# EAGLE board one-stage-full-wave-cockcroft-walton (EAGLE 9.5.0)
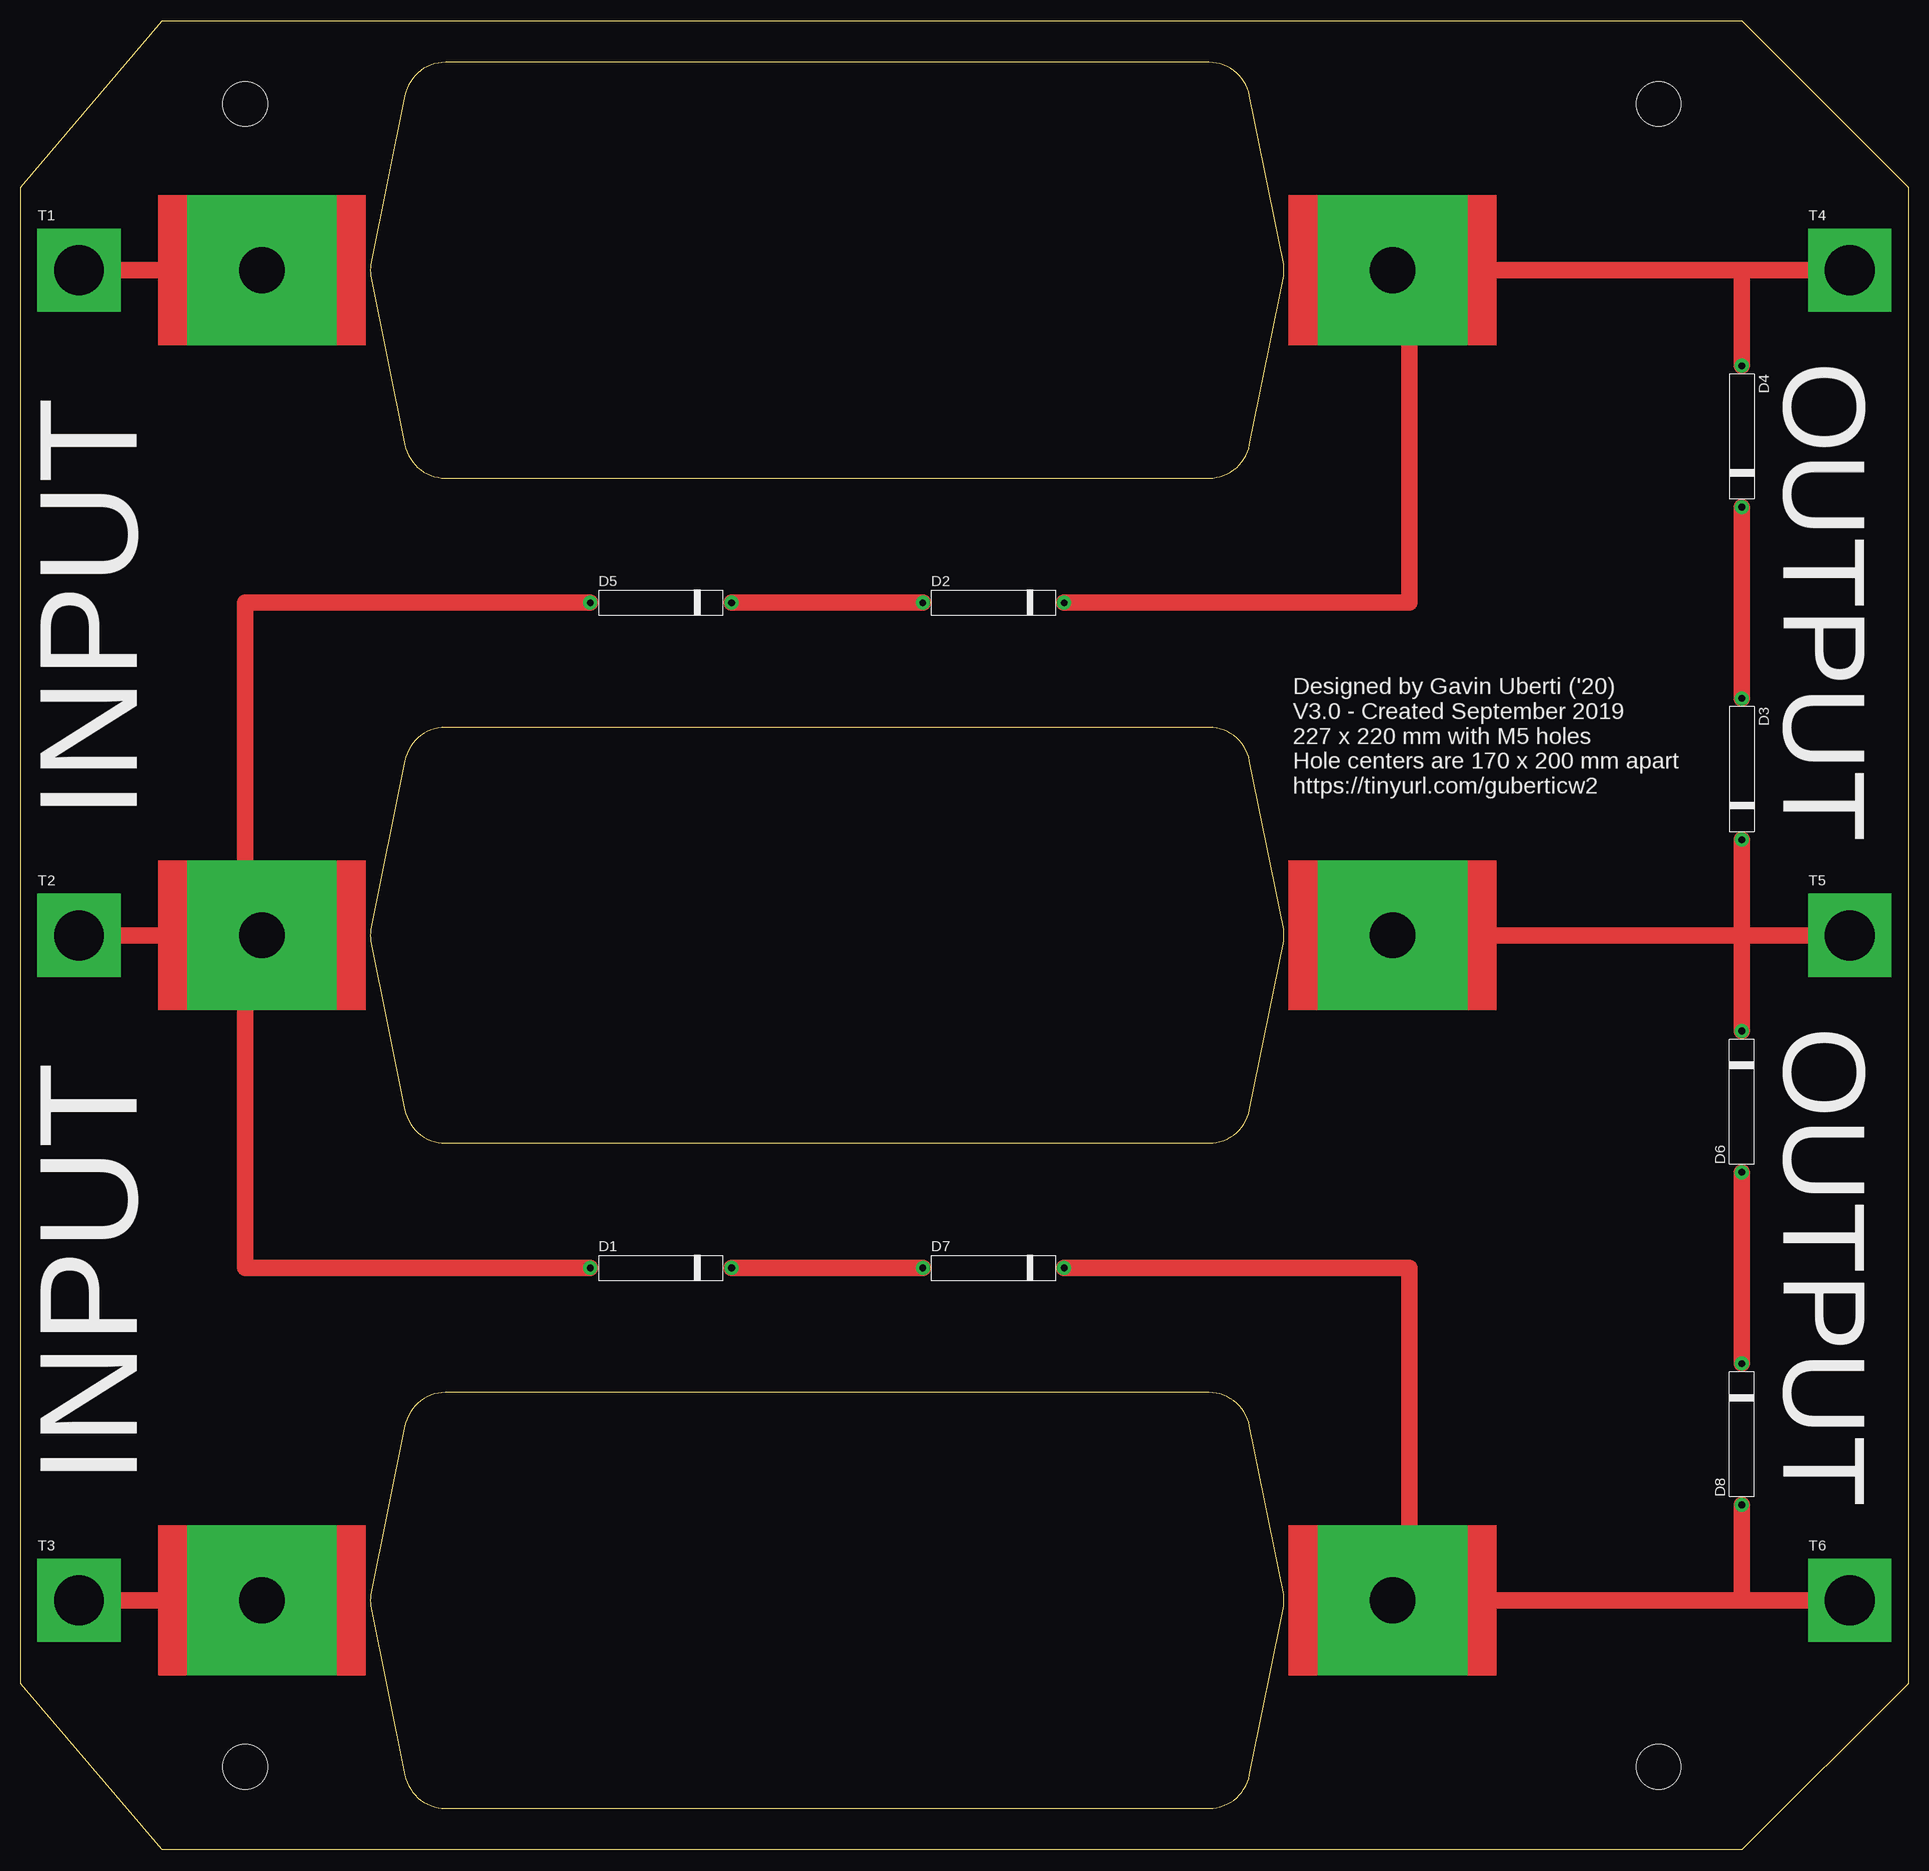
[diagram p0: board, top side]

Size 227 x 220 mm. Coordinates in mm from the lower left corner, seen from the top.
Outline: 17,0 0,20 0,200 17,220 207,220 227,200 227,20 207,0 17,0
Copper layers (1*16): Top 0.035mm / dielectric 1.5mm / Bottom 0.035mm
Design rules "default": minimum track width 6mil, minimum drill 0.35mm, track to track 6mil, track to pad 6mil, pad to pad 6mil, via to via 6mil, smd to smd 6mil, copper to edge 40mil, drill to drill 6mil, minimum pad ring 10mil, minimum via ring 8mil, stop-mask expansion 4mil, vias tented up to drill 0mil, thermal gap 10mil
Holes 5.4 mm at 27,210 197,210 197,10 27,10

## Footprints (pad centres in the part's own frame; a part is rotated, then mirrored left to right if it is on the bottom)
DIODE_14 = drill 0.8 pad 1.676: P$1 -8.5,0; P$2 8.5,0
LUG_SQUARE_M6 = drill 6 pad 10 square: P$1 0,0
HV_FILM_CAP = drill 5.5 pad 18 square: P$1 -68,0; P$2 68,0

## Placement (x,y rotation side)
D1  DIODE_14MM  [DIODE_14]  77,70 0 top
D2  DIODE_14MM  [DIODE_14]  117,150 0 top
D3  DIODE_14MM  [DIODE_14]  207,130 270 top
D4  DIODE_14MM  [DIODE_14]  207,170 270 top
D5  DIODE_14MM  [DIODE_14]  77,150 0 top
D6  DIODE_14MM  [DIODE_14]  207,90 90 top
D7  DIODE_14MM  [DIODE_14]  117,70 0 top
D8  DIODE_14MM  [DIODE_14]  207,50 90 top
T1  TERMINAL_M6  [LUG_SQUARE_M6]  7,190 0 top
T2  TERMINAL_M6  [LUG_SQUARE_M6]  7,110 0 top
T3  TERMINAL_M6  [LUG_SQUARE_M6]  7,30 0 top
T4  TERMINAL_M6  [LUG_SQUARE_M6]  220,190 0 top
T5  TERMINAL_M6  [LUG_SQUARE_M6]  220,110 0 top
T6  TERMINAL_M6  [LUG_SQUARE_M6]  220,30 0 top
U$1  HV_FILM_CAP  [HV_FILM_CAP]  97,110 180 top
U$2  HV_FILM_CAP  [HV_FILM_CAP]  97,190 180 top
U$3  HV_FILM_CAP  [HV_FILM_CAP]  97,30 180 top

## Library data of the parts
D1-D8 T1-T6 U$1-U$3 = guParts

## Nets
N$1: D1.P$1 D5.P$1 T2.P$1 U$1.P$2
N$2: D2.P$1 D5.P$2
N$3: D2.P$2 D4.P$1 T4.P$1 U$2.P$1
N$5: D3.P$1 D4.P$2
N$6: T3.P$1 U$3.P$2
N$7: T1.P$1 U$2.P$2
N$8: D7.P$2 D8.P$1 T6.P$1 U$3.P$1
N$9: D3.P$2 D6.P$2 T5.P$1 U$1.P$1
N$10: D1.P$2 D7.P$1
N$11: D6.P$1 D8.P$2

## Tracks (layer width: path | path; a pad name or v marks a point on that pad's centre or on a via)
N$1
  Top 2: D5.P$1 27,150 27,112 U$1.P$2 | D1.P$1 27,70 27,108 U$1.P$2 | T2.P$1 U$1.P$2
N$2
  Top 2: D5.P$2 D2.P$1
N$3
  Top 2: D2.P$2 167,150 167,188 U$2.P$1 207,190 | 207,190 T4.P$1 | D4.P$1 207,190
N$5
  Top 2: D3.P$1 D4.P$2
N$6
  Top 2: U$3.P$2 T3.P$1
N$7
  Top 2: U$2.P$2 T1.P$1
N$8
  Top 2: D8.P$1 207,30 | D7.P$2 167,70 167,32 U$3.P$1 207,30 | 207,30 T6.P$1
N$9
  Top 2: T5.P$1 207,110 | U$1.P$1 207,110 | 207,110 D3.P$2 | 207,110 D6.P$2
N$10
  Top 2: D1.P$2 D7.P$1
N$11
  Top 2: D8.P$2 D6.P$1

## Text on the board
tNames: OUTPUT | Designed by Gavin Uberti ('20) / V3.0 - Created September 2019 / 227 x 220 mm with M5 holes / Hole centers are 170 x 200 mm apart / https://tinyurl.com/guberticw2 | INPUT | OUTPUT | INPUT